# Altium PCB 0.PCB1.PcbDoc (part 3 of 8)
Units mil, origin at the board's own origin, x right, y up, seen from the top; angles counter-clockwise.
Board outline 3897.64 x 3897.64 mil, 6 copper layers (Top Layer, Layer 1, Layer 3, Layer 4, Layer 2, Bottom Layer), stack 60.567 mil thick; 715 components, 563 nets, 2530 pads, 1442 vias.
Unrouted connection lines stored in the file: 6.
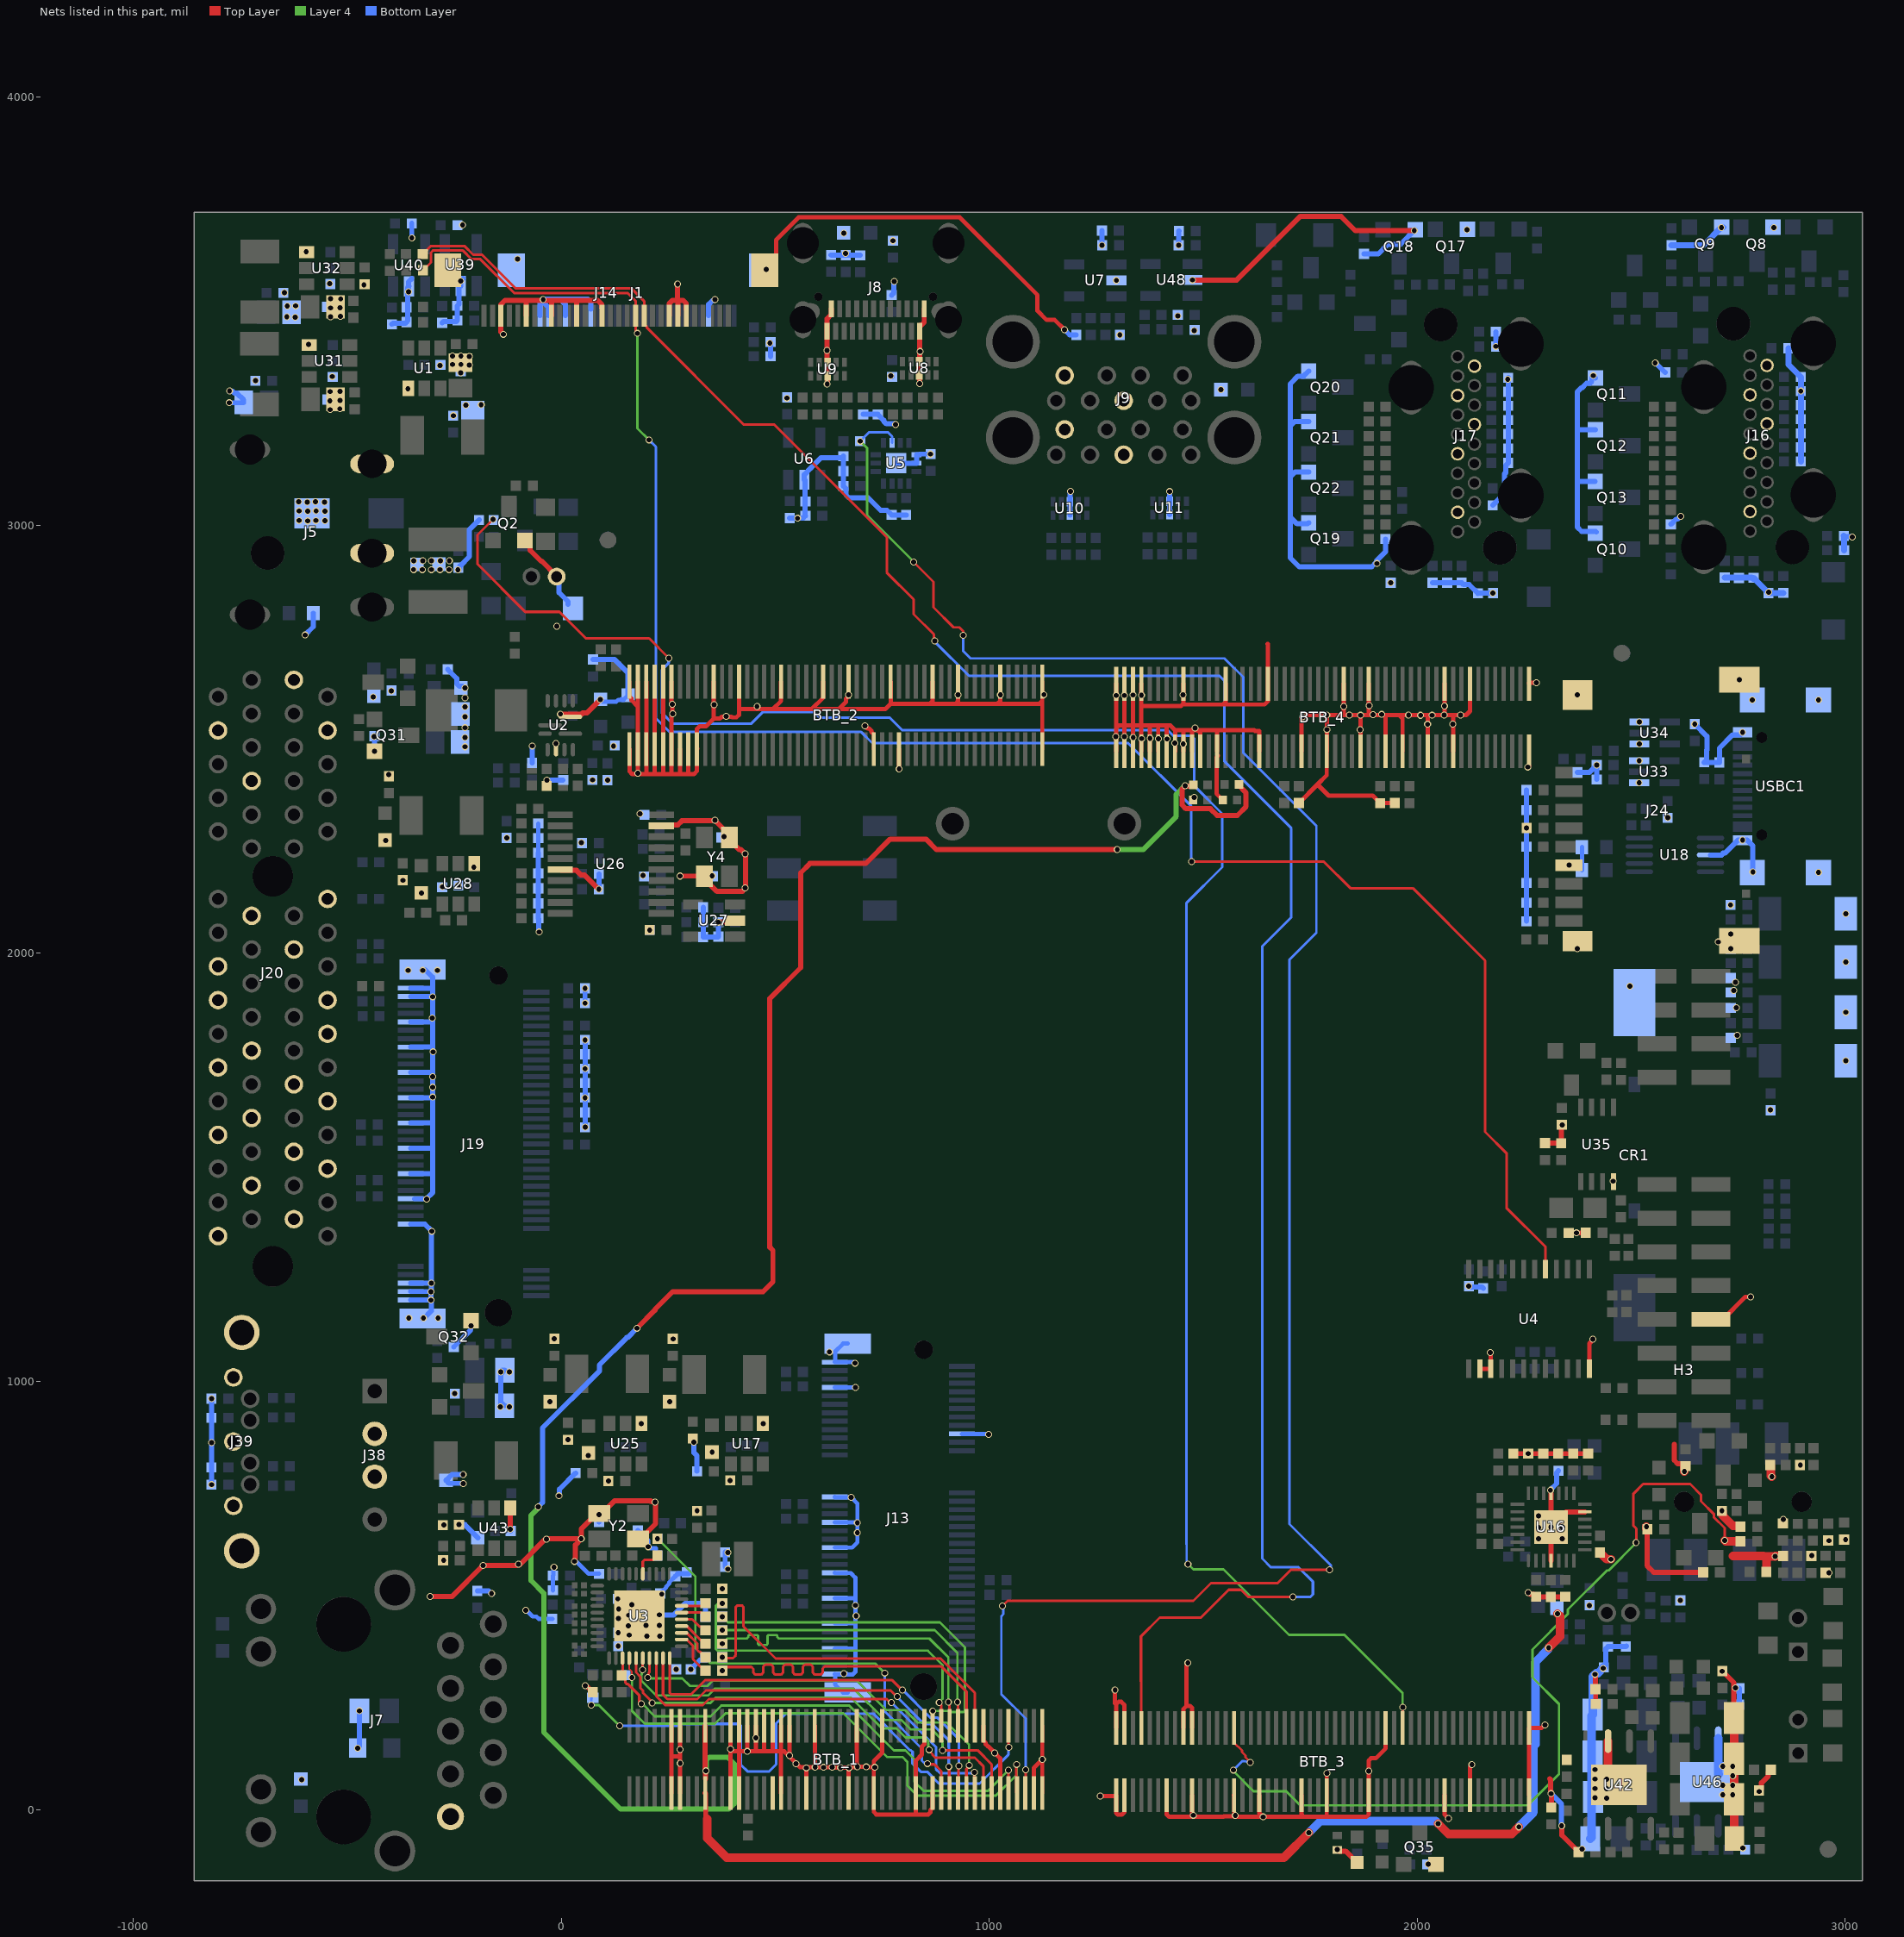
[diagram p7: the nets of this part, all layers, seen from the top]

## Via types
v1: diameter 16.14, hole 11.81, Top Layer to Bottom Layer, tented both sides, 1434 vias
v2: diameter 16.14, hole 11.81, Top Layer to Bottom Layer, 8 vias

## Nets (pads, with @x,y where several pads share a name; then routed paths per layer and width w, separated by ;. In a path a pad name is that pad's centre, name@x,y a point inside that pad or via, vN(x,y) a via of type N, cw(c..) or ccw(c..) an arc to the next point about the centre after c; other vN are vias at no path point) (continued)
CORE_VCCA_1V8_S0: BTB_1.10 BTB_1.91 L14.1 R20.2 R21.2 | length 7197.5
  Top Layer w12: v1(176.98,1124.22) 219.09,1166.33 219.09,1168.09 260.4,1209.4 471.6,1209.4 494.8,1232.6 494.8,1306 487.5,1313.3 487.5,1894.6 559.6,1966.7 559.6,2188.2 581.2,2209.8 711.9,2209.8 769,2266.9 852.2,2266.9 876.8,2242.3 1276.1,2242.3 ; BTB_1.91@336.65,38.17 337.73,37.09 337.73,-19.06 340.97,-22.3 ; BTB_1.10@336.65,195.65 336.65,92.97 338.2,91.42 v1(338.2,90.3) 337.43,89.53 BTB_1.91@337.43,71.54 ; 1277.7,2242.7 1278.1,2242.3 v1(1299.2,2242.3) ; v1(1457.5,2391.8) 1457.83,2391.47 v1@1457.83,2390.9 ; R20.2@1474.4,2394.7 1474.4,2392.14 1473.16,2390.9 v1@1457.83,2390.9 ; R21.2@1580.8,2394.4 1600.22,2374.98 1600.22,2342.72 1579.6,2322.1 1532.73,2322.1 1516.97,2337.86 1496.06,2337.86 1495.96,2337.96 1490.67,2337.96 1490.57,2337.86 1459.64,2337.86 1450.8,2346.7 1450.8,2383.87 v1@1457.83,2390.9
  Top Layer w20: 340.97,-22.3 340.97,-66.87 386.3,-112.2 1688.9,-112.2 v1(1746.9,-54.2) ; v1(2049.1,-33.1) 2073.3,-57.3 2220.9,-57.3 v1(2237.6,-40.6) ; v1(2307.1,377.9) 2333.4,404.2 2333.4,451.7 v1(2327.8,457.3)
  Layer 4 w12: v1@-51.9,705.6 -70.4,687.1 -70.4,534.9 -40.6,505.1 -40.6,180.27 138.77,0.9 391.6,0.9 404.4,13.7 404.4,106.4 388.7,122.1 346,122.1 338.97,115.07 338.97,91.07 v1(338.2,90.3) ; v1(1299.2,2242.3) 1359.7,2242.3 1437,2319.6 1437,2371.3 v1(1457.5,2391.8)
  Bottom Layer w12: v1(-53.3,707) -53.3,707.3 -43.3,717.3 -43.3,891.4 89.2,1023.9 89.2,1038.39 153.33,1102.52 155.27,1102.52 v1(176.98,1124.22)
  Bottom Layer w20: v1(1746.9,-54.2) 1773.8,-27.3 2043.3,-27.3 v1(2049.1,-33.1) ; v1(2237.6,-40.6) 2271.87,-6.33 2271.87,147.47 2276.39,151.98 2276.39,344.79 2307.1,375.5 v1(2307.1,377.9)
CTP0_INT: BTB_3.4 J14.11 R301.2 | length 5395.6
  Top Layer w6.16: R301.2@-323.22,3633.2 -303.99,3652.43 -226.15,3652.43 -205.47,3631.75 -184.58,3631.75 -106.63,3553.8 163.6,3553.8 193.87,3523.53 193.87,3469.84 200.57,3463.14 200.57,3461 426.67,3234.9 498.2,3234.9 760.8,2972.3 760.8,2889.5 823.6,2826.7 823.6,2792.4 870.9,2745.1 870.9,2732.2 v1(873.2,2729.9) ; 1354.6,299 1354.6,404.5 1398.34,448.24 1494.66,448.24 1559.62,513.2 1588.7,513.2 1605.3,496.6 v1(1709.4,496.6) ; BTB_3.4@1355.54,190.65 1355.54,299
  Bottom Layer w6.16: v1(873.2,2729.9) 873.2,2727.56 952.66,2648.1 1538.14,2648.1 1549.8,2636.44 1549.8,2448.2 1705.9,2292.1 1705.9,2084.5 1637.9,2016.5 1637.9,586 1658.1,565.8 1722.6,565.8 1756.4,532 1756.4,502.7 1750.3,496.6 v1(1709.4,496.6)
CTP0_RST: J14.12 R303.2 U4.17 | length 4599.8
  Top Layer w6.16: R303.2@-322.72,3595.6 -304.34,3613.98 -304.34,3637.14 -299.21,3642.27 -230.36,3642.27 -209.68,3621.59 -188.79,3621.59 -109.53,3542.33 155.57,3542.33 174.18,3523.72 J14.12@174.18,3489.52 174.18,3452.32 v1(178.2,3448.3) ; v1(1473.05,2214) 1782.25,2214 1844.12,2152.12 1989.72,2152.12 2158.81,1983.04 2158.81,1583.1 2208.71,1533.2 2208.71,1405.26 2299.79,1314.18 U4.17@2299.79,1261.94
  Layer 4 w5.61: v1(178.2,3448.3) 178.2,3226.3 v1(205.1,3199.4)
  Bottom Layer w6.16: v1(205.1,3199.4) 221.4,3183.1 221.4,2548.95 252.65,2517.7 700.1,2517.7 726.75,2491.05 1324.55,2491.05 1472.2,2343.4 1472.2,2214.85 v1(1473.05,2214)
EARPHONE_CTL: BTB_3.15 R326.2 | length 2090.5
  Top Layer w5.61: BTB_3.15@1572.7,177.5 1572.7,155.58 1590.53,137.76 1590.53,134.17 1596.66,128.04 1598.84,125.86 1598.84,121.9 1609.96,110.77 v1(1609.96,109.71)
  Top Layer w6.16: v1(2511.5,623.4) 2512.2,624.1 2512.2,655.9 2505.3,662.8 2505.3,737.8 2527.89,760.39 2637.74,760.39 2663.25,734.87 2663.25,720.15 2692.93,690.47 2692.93,682.91 2718.31,657.53 v1(2718.31,628.42)
  Top Layer w20: v1(2718.31,628.42) 2720.21,626.52 R326.2@2755.03,626.52
  Layer 4 w5.61: v1(1570.4,92.2) 1569.25,91.05 1569.25,90.75 1617.5,42.5 1693.9,42.5 1726.6,9.8 2258.1,9.8 2331.3,83 2331.3,246.3 2269.11,308.49 2269.11,373.8 2352.2,456.89 2352.2,467.6 2443.2,558.6 2447.4,558.6 v1@2511.85,623.05
  Bottom Layer w5.61: v1(1570.4,92.2) 1590.67,112.47 1591.01,112.81 1595.66,112.81 v1(1609.96,109.71)
EXT_PWR_EN: BTB_1.83
FAN_CTRL: BTB_3.35 R133.1 | length 4783.4
  Top Layer w6.16: v1(-159.3,3013.8) -195.5,2977.6 -195.5,2909.3 -84,2797.8 -4.3,2797.8 57.7,2735.8 205.6,2735.8 v1(251.8,2689.6) ; BTB_3.35@1965.78,190.65 1966.07,190.95 1966.07,238.64 v1(1966.36,238.94)
  Layer 4 w5.61: v1(1464.4,573.3) 1464.9,573.3 1477.25,560.95 1547.55,560.95 1700.6,407.9 1829.89,407.9 1965.7,272.09 1965.7,239.6 v1(1966.36,238.94)
  Bottom Layer w5.61: 1461.3,619.11 1461.3,579.25 1464.4,576.15 v1(1464.4,573.3)
  Bottom Layer w6.16: v1(251.8,2689.6) 251.17,2688.97 251.17,2678.07 235.79,2662.69 235.79,2561.05 260.74,2536.1 443.6,2536.1 471.65,2564.15 476.75,2564.15 477.2,2563.7 590,2563.7 603.3,2550.4 767.9,2550.4 796.75,2521.55 1416.95,2521.55 1430.2,2508.3 1472.6,2508.3 1478.7,2502.2 1478.7,2392 1544.5,2326.2 1544.5,2201.1 1461.3,2117.9 1461.3,619.11
FUSB302_INT: BTB_1.53 R87.2 U5.5 | length 4867.3
  Top Layer w5.61: v1(823.5,2914.1) 869.8,2867.8 869.8,2808.5 916.7,2761.6 930.3,2761.6 939.5,2752.4 v1(939.5,2742.9) ; v1(1030.86,475.37) 1043.01,487.52 1477.22,487.52 1518.6,528.9 1673.9,528.9 1705.1,560.1 v1(1795.1,560.1) ; BTB_1.53@1084.68,38.17 1085.04,38.53 1085.04,92.64 v1(1085.4,93)
  Layer 4 w5.61: v1(698.76,3196.4) 714.9,3180.26 714.9,3023.91 823.5,2915.31 v1(823.5,2914.1)
  Bottom Layer w5.61: v1(939.5,2742.9) 939.5,2706.1 956.6,2689 1549.64,2689 1593.8,2644.84 1593.8,2468.39 1764.4,2297.8 1764.4,2048.2 1701.4,1985.2 1701.4,667.05 1798,570.46 v1@1798,557.2 ; v1(1030.86,475.37) 1032.87,473.35 1032.87,460.89 1033.04,460.72 1033.04,456.08 1028.52,451.56 1028.52,269.38 1085.4,212.5 v1(1085.4,93)
  Bottom Layer w6.16: v1(698.76,3196.4) 719.36,3217 763.76,3217 773.36,3207.4 773.36,3193.18 U5.5@772.82,3192.64
GMAC0_MCLKINOUT: BTB_1.63 R67.1 R68.1 | length 1106.6
  Top Layer w6.16: v1(855.42,107.35) 857.33,105.44 872.18,105.44 887.83,89.78 BTB_1.63@887.83,38.17
  Layer 4 w5.61: v1(225.06,632.56) 313.67,543.95 313.67,376.53 347.6,342.6 364.25,342.6 365.95,340.9 734.3,340.9 v1(756.4,318.8)
  Bottom Layer w6.16: v1(756.4,318.8) 756.4,228.6 842.8,142.2 842.8,114.08 847.67,109.21 853.56,109.21 v1(855.42,107.35)
GMAC0_MCLKINOUT_R: R67.2 U3.35 | length 68.8
  Top Layer w6.16: U3.35@190.76,550.54 190.76,579.27 194.37,582.88 214.74,582.88 R67.2@225.06,593.2
GMAC0_MDC: BTB_1.55 R61.2 U3.13 | length 1195.8
  Top Layer w6.16: U3.13@143.52,353.68 143.52,315.24 R61.2@141.56,313.28 149.9,304.94 149.9,296.41 153.51,292.8 156.29,292.8 182.7,266.39 182.7,250.26 186.31,246.65 v1(187.34,246.65) ; v1(1045.1,91.5) 1045.21,91.39 1045.21,38.28 BTB_1.55@1045.31,38.17
  Layer 4 w5.61: v1@187.7,248.5 188,248.5 218.7,217.8 349.3,217.8 374.1,242.6 673,242.6 777.2,138.4 804.6,138.4 825.8,117.2 825.8,64.9 847.2,43.5 997.1,43.5 v1(1045.1,91.5)
GMAC0_MDIO: BTB_1.54 R62.2 U3.14 | length 1273.3
  Top Layer w4: U3.14@159.27,353.68 159.27,328.14 165.43,321.99 v1(165.43,308.34)
  Top Layer w6.16: v1(1063.9,105.3) 1063.2,104.6 1063.2,39.97 BTB_1.54@1065,38.17
  Layer 4 w5.61: v1@165.2,309.3 165.43,309.07 v1(165.43,308.34) 165.43,230.27 195.3,200.4 359.6,200.4 384,224.8 659.3,224.8 761.8,122.3 798,122.3 809,111.3 809,55.2 831.9,32.3 1015.4,32.3 1063.9,80.8 v1(1063.9,105.3)
GMAC0_RSTn: BTB_1.46 D7.1 | length 1404.6
  Top Layer w6.16: BTB_1.46@1045.32,195.65 1045.32,145.68 v1(1045.9,145.1)
  Layer 4 w5.61: v1(70.68,243.82) 70.9,243.6 88.1,243.6 136.4,195.3 v1(136.5,195.3)
  Bottom Layer w6.16: v1(70.68,243.82) 70.68,259.58 D7.1@71.1,260 ; v1(136.5,195.3) 275.85,195.3 280.65,200.1 416.32,200.1 419.93,196.49 419.93,104.66 436.09,88.5 485.2,88.5 502.2,105.5 502.2,119 502.7,119.5 502.7,201.5 525.12,223.92 729.58,223.92 815.2,138.3 817.39,138.3 821,134.69 821,107.2 840.2,88 855.2,88 882.5,60.7 977.6,60.7 1044.69,127.79 1044.69,143.89 v1(1045.9,145.1)
GMAC0_RXCLK: BTB_1.38 R56.1 R59.1 | length 810.2
  Top Layer w6.16: v1(883.3,250.1) 883.3,248.3 887.83,243.77 BTB_1.38@887.83,195.65
  Layer 4 w5.61: v1(376.5,481.78) 374.48,479.76 364.96,479.76 361.4,476.2 361.4,375.1 365.45,371.05 390.31,371.05 857.05,371.05 890.8,337.3 890.8,258.65 883.3,251.15 v1(883.3,250.1)
GMAC0_RXCLK_R: R56.2 U3.27 | length 58.3
  Top Layer w6.16: U3.27@281.32,475.73 331.09,475.73 R56.2@337.14,481.78
GMAC0_RXD0: BTB_1.40 R48.2 R51.1 | length 741.9
  Top Layer w6.16: v1(925.8,251.1) 927.2,249.7 BTB_1.40@927.2,195.65
  Layer 4 w5.61: v1@376.61,418.78 872.82,418.78 925.8,365.8 v1(925.8,251.1)
  other v1: 376.44,418.78
GMAC0_RXD0_R: R51.2 U3.25 | length 66.3
  Top Layer w6.16: U3.25@281.32,444.24 306.31,444.24 323.05,427.5 328.36,427.5 R51.2@337.08,418.78
GMAC0_RXD1: BTB_1.39 R49.2 R52.1 | length 763.2
  Top Layer w6.16: v1(904.7,250.6) 907.52,247.78 BTB_1.39@907.52,195.65
  Layer 4 w5.61: v1(376.44,387.28) 388.66,399.5 431.1,399.5 433.91,399.5 437.19,402.79 437.19,405.4 439.45,407.66 457.54,407.66 459.8,405.4 459.8,386.75 462.06,384.49 480.15,384.49 482.41,386.75 482.41,405.4 484.67,407.66 502.76,407.66 505.02,405.4 505.02,402.79 508.31,399.5 518.4,399.5 860.3,399.5 904.7,355.1 v1(904.7,250.6)
GMAC0_RXD1_R: R52.2 U3.24 | length 72.8
  Top Layer w6.16: U3.24@281.32,428.49 293.12,428.49 325.62,396 328.36,396 R52.2@337.08,387.28
GMAC0_RXD2: BTB_1.42 R54.1 R58.1 | length 889.5
  Top Layer w6.16: v1(376.44,355.78) R54.1@379.78,352.44 ; R54.1@386.7,353.7 401.6,353.7 408.1,360.2 408.1,473.09 411.71,476.7 422.39,476.7 426,473.09 426,427.84 501.4,352.44 886.44,352.44 966.57,272.31 BTB_1.42@966.57,195.65
GMAC0_RXD2_R: R54.2 U3.23 | length 88.2
  Top Layer w6.16: U3.23@281.32,412.74 293.13,412.74 318.2,387.67 318.2,372.55 322.35,368.4 324.46,368.4 R54.2@337.08,355.78
GMAC0_RXD3: BTB_1.41 R50.2 R55.1 | length 811.6
  Top Layer w6.16: v1(376.44,324.28) 385.16,333 418.1,333 444.34,333 448.97,328.37 448.97,319.71 453.6,315.07 467.5,315.07 472.13,319.71 472.13,333.76 476.76,338.4 490.66,338.4 495.29,333.76 495.29,319.71 499.92,315.07 513.82,315.07 518.45,319.71 518.45,333.76 523.08,338.4 536.98,338.4 541.61,333.76 541.61,319.71 546.24,315.07 560.14,315.07 564.77,319.71 564.77,333.76 569.4,338.4 583.3,338.4 587.93,333.76 587.93,319.71 592.56,315.07 606.46,315.07 611.09,319.71 611.09,329.48 615.72,334.11 675.31,334.11 888.19,334.11 946.89,275.41 BTB_1.41@946.89,195.65
GMAC0_RXD3_R: R55.2 U3.22 | length 104
  Top Layer w6.16: U3.22@281.32,396.99 293.12,396.99 308.04,382.07 308.04,351.21 326.25,333 328.36,333 R55.2@337.08,324.28
GMAC0_RXDV_CRS: BTB_1.37 R57.1 R60.1 | length 856
  Top Layer w6.16: BTB_1.37@868.15,195.65 868.15,230.05 v1(868.3,230.2)
  Layer 4 w5.61: v1(376.44,450.28) 389.62,437.1 884.79,437.1 943.1,378.8 943.1,230.89 939.81,227.6 906.78,227.6 904.18,230.2 v1(868.3,230.2)
GMAC0_RXDV_CRS_R: R57.2 U3.26 | length 59.8
  Top Layer w6.16: U3.26@281.32,459.98 327.38,459.98 R57.2@337.08,450.28
GMAC0_TXCLK: BTB_1.61 U3.20 | length 955.8
  Top Layer w6.16: U3.20@253.76,353.68 253.76,272.39 257.37,268.78 303.09,268.78 336.31,302 773.4,302 796,279.4 v1(797.61,279.4) ; BTB_1.61@927.2,38.17 928.05,39.02 928.05,100.75 v1(928.9,101.6)
  Bottom Layer w6.16: v1(797.61,279.4) 861.96,215.05 878.55,215.05 928.9,164.7 v1(928.9,101.6)
GMAC0_TXD0: BTB_1.59 U3.18 | length 998.5
  Top Layer w6.16: U3.18@222.26,353.68 222.26,264.64 243.1,243.8 331.1,243.8 345.3,258 760.84,258 768.85,249.99 v1(771.55,249.99) ; v1(965.25,87) 965.91,86.34 965.91,38.84 BTB_1.59@966.57,38.17
  Bottom Layer w6.16: v1(771.55,249.99) 875.55,145.99 875.55,94.45 884.9,85.1 963.35,85.1 v1(965.25,87)
GMAC0_TXD1: BTB_1.60 U3.17 | length 991.1
  Top Layer w6.16: v1(202.33,307.99) 204.24,309.9 204.24,318.71 206.51,320.98 U3.17@206.51,353.68 ; BTB_1.60@946.89,38.17 946.89,94.39 953.1,100.6 v1(953.1,103.3)
  Layer 4 w5.61: v1@201.7,310.6 206.1,306.2 283.1,306.2 300.67,288.63 341.75,288.63 354.62,301.5 690.6,301.5 760,232.1 803.9,232.1 833.1,202.9 901.3,202.9 953.1,151.1 v1(953.1,103.3)
GMAC0_TXD2: BTB_1.57 U3.16 | length 1047.6
  Top Layer w6.16: v1(190.36,326.26) 190.56,326.46 190.56,353.48 U3.16@190.76,353.68 ; v1(891,138.4) 972.8,138.4 1005.94,105.26 BTB_1.57@1005.94,38.17
  Layer 4 w5.61: v1(190.36,326.26) 188.35,324.25 188.35,315.05 187.45,314.15 187.45,301.28 222.44,266.3 342.9,266.3 359.3,282.7 682.7,282.7 756.1,209.3 794.6,209.3 816.8,187.1 865.3,187.1 891,161.4 v1(891,138.4)
GMAC0_TXD3: BTB_1.58 U3.15 | length 1042
  Top Layer w6.16: U3.15@175.02,353.68 175.02,320.18 185.15,310.05 185.15,283.55 191.6,277.1 191.6,272 212.74,250.86 v1(212.74,248.92) ; v1(859.87,139.6) 859.87,136.9 867.65,129.12 867.65,127.25 874,120.9 966.5,120.9 986.26,101.14 BTB_1.58@986.26,38.17
  Layer 4 w5.61: v1(212.74,248.92) 212.94,249.12 348.72,249.12 360.8,261.2 677.6,261.2 749.4,189.4 783.3,189.4 804.6,168.1 850.31,168.1 858,160.41 858,141.47 v1(859.87,139.6)
GMAC0_TXEN: BTB_1.62 U3.19 | length 939.7
  Top Layer w6.16: U3.19@238.01,353.68 238.01,267.99 248.2,257.8 318,257.8 338.1,277.9 769.9,277.9 783.92,263.88 v1(785.5,263.88) ; v1(905.6,100.25) 906.56,99.29 906.56,39.13 BTB_1.62@907.52,38.17
  Bottom Layer w6.16: v1(785.5,263.88) 785.5,262.14 848.44,199.2 868,199.2 905.6,161.6 905.6,145.23 906.15,144.68 906.15,132.12 905.6,131.57 v1(905.6,100.25)
GND: BTB_1.6 BTB_1.7 BTB_1.13 BTB_1.14 BTB_1.15 BTB_1.16 BTB_1.17 BTB_1.18 BTB_1.19 BTB_1.20 BTB_1.23 BTB_1.28 BTB_1.31 BTB_1.36 BTB_1.43 BTB_1.50 BTB_1.51 BTB_1.52 BTB_1.56 BTB_1.64 BTB_1.66 BTB_1.71 BTB_1.74 BTB_1.79 BTB_1.82 BTB_1.87 BTB_1.88 BTB_1.94 BTB_1.95 BTB_2.1 BTB_2.2 BTB_2.3 BTB_2.4 BTB_2.5 BTB_2.6 BTB_2.11 BTB_2.14 BTB_2.19 BTB_2.24 BTB_2.27 BTB_2.32 BTB_2.37 BTB_2.40 BTB_2.45 BTB_2.50 BTB_2.51 BTB_2.68 BTB_2.71 BTB_2.92 BTB_2.93 BTB_2.94 BTB_2.95 BTB_2.96 BTB_2.97 BTB_2.98 BTB_2.99 BTB_2.100 BTB_3.1 BTB_3.2 BTB_3.9 BTB_3.10 BTB_3.33 BTB_3.50 BTB_3.51 BTB_3.58 BTB_3.61 BTB_3.70 BTB_3.75 BTB_3.78 BTB_3.83 BTB_3.86 BTB_3.91 BTB_3.94 BTB_3.99 BTB_3.100 BTB_4.1 BTB_4.2 BTB_4.3 BTB_4.4 BTB_4.9 BTB_4.14 BTB_4.19 BTB_4.28 BTB_4.31 BTB_4.40 BTB_4.43 BTB_4.50 BTB_4.51 BTB_4.60 BTB_4.63 BTB_4.66 BTB_4.68 BTB_4.71 BTB_4.75 BTB_4.78 BTB_4.83 BTB_4.88 BTB_4.90 BTB_4.91 BTB_4.92 BTB_4.93 BTB_4.94 BTB_4.95 BTB_4.96 BTB_4.97 BTB_4.98 BTB_4.99 BTB_4.100 C1.2 C2.2 C3.2 C4.2 C5.2 C8.2 C9.2 C10.2 C11.2 C12.2 C13.2 C15.2 C17.2 C18.2 C19.2 C21.2 C22.2 C23.2 C24.2 C25.2 C26.2 C27.2 C28.2 C29.2 C30.2 C31.2 C32.2 C35.1 C36.1 C50.2 C51.2 C52.2 C53.2 C54.2 C55.2 C56.2 C57.2 C58.2 C59.2 C60.2 C61.2 C62.2 C63.2 C64.2 C65.2 C66.2 C67.2 C68.2 C69.2 C70.2 C71.2 C72.2 C73.2 C74.2 C77.2 C78.2 C81.2 C86.2 C87.2 C88.2 C89.2 C90.2 C91.2 C106.2 C107.2 C108.2 C109.2 C110.2 C111.2 C114.2 C116.2 C118.2 C119.2 C120.2 C121.2 C123.2 C124.2 C125.2 C129.2 C130.2 C141.2 C153.2 C158.2 C159.2 C160.2 C161.2 C162.2 C163.2 C164.2 C165.2 C166.2 C167.2 C168.2 C169.2 C170.2 C171.2 C172.2 C173.2 C174.2 C180.2 C181.2 C182.2 C183.2 C184.2 C185.2 C186.2 C187.2 C188.2 C193.2 C195.2 C196.2 C197.2 C198.2 C210.2 C211.2 C218.2 C219.2 C226.2 C227.2 C228.2 C229.2 C230.2 C231.2 C233.2 C234.2 C235.2 C236.2 C237.2 C238.2 C239.2 C240.2 C241.2 C249.2 C250.2 C253.2 C256.2 C257.2 C259.2 C260.2 C261.2 C262.2 C278.2 C280.2 C281.2 C282.2 C284.2 C285.2 C286.2 C288.2 C289.2 C291.2 C292.2 C293.2 C294.2 C299.1 C300.2 C301.2 C302.2 C303.2 C304.2 C305.2 C306.2 C307.2 C309.1 C310.2 C311.2 C312.2 CR1.2 D1.1 D2.1 D3.1 D4.1 D5.1 D6.1 D8.1 D9.1 D10.1 D11.1 D12.1 D13.1 D14.1 D15.2 D16.1 D17.1 D18.1 D19.1 D20.1 D21.1 D22.1 D23.2 D24.1 D25.1 D27.1 D28.1 D29.1 D30.1 D31.1 D32.1 D34.1 D35.1 D36.1 D37.1 D38.1 D39.1 D50.1 D51.1 D52.1 D53.1 D54.1 D59.2 D65.1 D66.1 D67.1 D68.1 D69.1 D70.1 D71.1 D72.1 D73.1 D78.1 D79.1 D80.1 D81.1 D82.1 D83.1 D85.1 D86.1 D87.1 D88.1 H3.7 J1.4 J1.18 J1.21 J1.23 J1.24 J1.25 J1.26 J5.2 J5.3 J7.10 J8.A1 J8.A12 J8.B1 J8.B12 J9.4 J9.7 J9.13 J9.16 J12.2 J13.1 J13.7 J13.18 J13.33 J13.39 J13.45 J13.51 J13.57 J13.63 J13.69 J13.75 J13.76 J13.77 J14.6 J14.7 J14.8 J14.16 J14.19 J14.22 J14.25 J14.28 J14.31 J14.32 J16.2 J16.5 J16.8 J16.11 J16.17 J17.2 J17.5 J17.8 J17.11 J17.17 J19.1 J19.3 J19.9 J19.15 J19.21 J19.27 J19.33 J19.39 J19.45 J19.51 J19.57 J19.71 J19.73 J19.75 J19.76 J19.77 J20.A1 J20.A4 J20.A12 J20.A15 J20.A18 J20.A20 J20.A23 J20.A24 J20.A27 J20.A28 J20.A31 J20.B4 J20.B7 J20.B13 J20.B16 J20.B18 J20.B21 J20.B22 J20.B25 J20.B26 J20.B29 J20.B32 J24.6 J24.10 J24.11 J24.12 J24.13 J38.2 J38.3 J39.1 J39.4 J39.7 J39.S1 J39.S2 L1.2 L11.2 L12.2 LED1.2 Q2.2 Q8.2 Q9.2 Q10.2 Q11.2 Q12.2 Q13.2 Q17.2 Q18.2 Q19.2 Q20.2 Q21.2 Q22.2 Q31.2 Q32.2 Q35.2 R7.2 R16.2 R17.2 R18.2 R22.1 R23.1 R53.2 R58.2 R59.2 R60.2 R66.2 R68.2 R71.2 R72.2 R78.1 R95.2 R97.2 R98.2 R99.2 R117.1 R118.2 R123.2 R135.2 R136.2 R139.2 R141.2 R149.2 R156.2 R160.2 R171.2 R177.2 R181.2 R192.2 R219.2 R220.2 R222.2 R227.2 R231.2 R232.2 R233.2 R234.2 R240.2 R241.2 R244.2 R245.2 R250.2 R252.2 R257.2 R271.2 R274.2 R308.2 R309.2 R317.2 R321.2 R322.2 R323.2 R325.2 R327.2 R335.2 R346.2 R352.2 SW1.1 SW2.1 SW3.1 SW4.1 U1.1 U2.2 U2.10 U3.41 U4.2 U4.3 U4.12 U5.8 U5.9 U5.15 U6.2 U7.2 U8.3 U8.8 U9.3 U9.8 U10.3 U10.8 U11.3 U11.8 U16.4 U16.13 U16.18 U16.29 U17.1 U18.3 U23.1 U25.1 U26.9 U26.16 U27.2 U28.1 U31.1 U32.1 U33.1 U33.3 U34.1 U34.3 U35.4 U39.2 U40.2 U42.7 U42.9 U43.1 U46.7 U46.9 U48.2 USBC1.13 USBC1.14 USBC1.15 USBC1.16 USBC1.A1B12 USBC1.B1A12 Y2.2 Y2.4 Y4.2 Y4.4 | length 29604.6
  Top Layer w10: BTB_2.100@159.49,2477.17 159.57,2477.09 159.57,2424.93 165.9,2418.6 310.2,2418.6 317.5,2425.9 317.5,2477.6 BTB_2.92@318.3,2478.4 ; BTB_2.1@159.49,2634.65 159.49,2600.36 164.25,2595.6 164.25,2591.02 179.17,2576.1 ; v1(179.17,2420.63) BTB_2.99@179.17,2477.17 179.17,2576.1 ; BTB_2.2@179.17,2634.65 179.17,2576.1 ; 198.2,2418.7 198.86,2419.36 BTB_2.98@198.86,2477.17 BTB_2.3@198.86,2634.65 ; 218.54,2419.36 BTB_2.97@218.54,2477.17 BTB_2.4@218.54,2634.65 ; 238.23,2419.36 BTB_2.96@238.23,2477.17 BTB_2.5@238.23,2634.65 ; BTB_1.95@257.91,38.17 257.91,123.95 ; BTB_1.6@257.91,195.65 257.91,123.95 ; 257.91,2419.36 257.91,2555.45 260.5,2558.04 v1(260.5,2559.7) 259.95,2560.25 259.95,2582.71 257.99,2584.67 257.99,2634.57 BTB_2.6@257.91,2634.65 ; BTB_1.94@277.6,38.17 277.68,38.25 277.68,107.28 v1(278.2,107.8) 278.1,107.9 278.1,123.95 ; BTB_1.7@277.6,195.65 277.68,195.57 277.68,140.42 278.1,140 278.1,123.95 ; 277.6,2419.36 BTB_2.94@277.6,2477.17 ; 297.28,2419.36 BTB_2.93@297.28,2477.17 ; BTB_2.92@316.97,2477.17 317.05,2477.25 317.05,2523.99 323.16,2530.1 338.2,2530.1 356.34,2548.24 ; BTB_2.11@356.34,2634.65 356.34,2548.24 ; BTB_1.88@395.71,38.17 v1(395.7,141.3) ; BTB_1.13@395.71,195.65 v1(395.7,141.3) ; BTB_1.87@415.39,38.17 415.39,135.7 ; BTB_1.14@415.39,195.65 415.39,135.7 ; BTB_2.14@415.39,2634.65 415.39,2570.6 ; BTB_1.15@435.08,195.65 v1(435.08,135.7) ; 454.76,138.29 BTB_1.16@454.76,195.65 ; 474.45,138.29 BTB_1.17@474.45,195.65 ; J14.32@475.37,3595.82 501.87,3622.31 501.87,3666.22 554.85,3719.2 931.4,3719.2 1112.9,3537.7 1112.9,3501.2 1134.45,3479.65 1153.18,3479.65 v1(1175.9,3456.93) ; 494.13,138.29 BTB_1.18@494.13,195.65 ; BTB_1.82@513.82,38.17 513.82,135.7 ; BTB_1.19@513.82,195.65 513.82,135.7 ; BTB_2.19@513.82,2634.65 BTB_2.19@513.82,2634.65 513.74,2589.54 494.8,2570.6 ; v1(533.5,126.1) BTB_1.20@533.5,195.65 ; BTB_1.79@572.87,38.17 v1(572.87,97.3) ; BTB_1.23@592.56,195.65 592.56,99.54 v1(593.4,98.7) ; BTB_2.24@612.24,2634.65 612.24,2597.32 585.52,2570.6 ; v1(613.44,98.38) 613.28,98.54 593.56,98.54 v1(593.4,98.7) ; v1@614.46,98.56 632.94,98.56 v1(633.12,98.74) ; v1@634.13,98.55 634.28,98.7 634.98,98 v1(652.79,98) 670.6,98 671.3,97.3 BTB_1.74@671.3,38.17 ; BTB_2.27@671.22,2600.28 665.54,2594.6 665.54,2587.14 649,2570.6 ; BTB_2.27@671.3,2634.65 671.3,2604.08 v1(671.43,2603.96) ; v1(672.46,97.26) 674.12,97.26 675.36,98.49 690.78,98.49 692.47,100.18 693.12,99.53 712.57,99.53 713.18,98.92 732.17,98.92 v1(732.65,98.43) ; BTB_1.28@690.98,195.65 690.98,100.68 v1(692,99.67) ; v1(709.7,2531.6) 715.76,2525.54 719.32,2525.54 724.59,2520.27 724.59,2517.23 730.35,2511.46 BTB_2.71@730.35,2477.17 ; BTB_1.31@750.04,195.65 750.04,132.74 730.35,113.05 BTB_1.71@730.35,38.17 730.35,-5.64 736.21,-11.5 829.4,-11.5 ; BTB_2.32@769.72,2634.65 769.72,2582.92 ; BTB_2.68@789.41,2477.17 789.49,2477.09 789.49,2431.21 v1(789.7,2431) ; BTB_1.36@848.46,195.65 848.39,195.57 848.39,152.26 842.8,146.67 842.8,128.14 828.78,114.12 BTB_1.66@828.78,38.17 828.78,-10.88 829.4,-11.5 ; BTB_1.64@868.15,38.17 868.15,3.88 862.39,-1.88 862.39,-6.74 857.63,-11.5 829.4,-11.5 ; BTB_2.37@868.15,2634.65 868.15,2589.75 861.32,2582.92 ; v1(927,2603.9) BTB_2.40@927.2,2604.11 ; BTB_2.40@927.2,2634.65 BTB_2.40@927.2,2604.11 ; BTB_1.43@986.26,195.65 986.26,161.36 992.02,155.6 992.02,152.56 997.3,147.28 997.92,147.28 v1(1012.9,132.3) 1025.63,119.57 BTB_1.56@1025.63,38.17 ; BTB_2.45@1025.55,2600.28 1025.55,2589.65 1018.82,2582.92 ; BTB_2.45@1025.63,2634.65 1025.63,2604.67 v1(1026.3,2604) ; BTB_1.52@1104.37,38.17 1104.37,97.23 v1(1124.06,116.91) ; BTB_1.51@1124.06,38.17 v1(1124.06,116.91) ; BTB_1.50@1124.06,195.65 v1(1124.06,116.91) ; BTB_2.51@1124.06,2477.17 1124.06,2589.86 ; BTB_2.50@1124.06,2634.65 BTB_2.50@1124.06,2604.38 ; v1(1128,2604.3) 1124.13,2604.3 BTB_2.50@1124.06,2604.38 ; v1(1259.6,31.7) 1296.41,31.7 1296.49,31.78 BTB_3.100@1296.49,33.17 1296.57,33.09 1296.57,-8.01 1300.46,-11.9 1310.24,-11.9 1316.09,-6.04 1316.09,33.09 BTB_3.99@1316.17,33.17 ; v1(1294.1,278.9) 1294.1,248.03 1296.49,245.64 ; v1(1295.6,2506.2) 1296.49,2505.31 BTB_4.100@1296.49,2472.17 ; BTB_3.1@1296.49,190.65 1296.49,245.64 ; BTB_4.100@1296.49,2506.2 1296.49,2525.89 ; BTB_4.1@1296.49,2629.65 v1(1296.51,2602.5) 1296.49,2525.89 ; v1(1315.9,2506.4) 1316.17,2506.13 BTB_4.99@1316.17,2472.17 ; BTB_3.2@1316.17,190.65 1316.17,243.73 1308.4,251.5 1302.35,251.5 1296.49,245.64 ; BTB_4.99@1316.17,2506.54 1316.17,2532.4 ; BTB_4.2@1316.17,2595.28 1316.17,2532.4 ; v1(1316.2,2602.5) BTB_4.2@1316.17,2629.65 ; BTB_4.98@1335.86,2472.17 1335.86,2503.96 v1(1336.4,2504.5) ; BTB_4.98@1335.86,2506.54 1335.86,2532.4 ; BTB_4.3@1335.86,2595.28 1335.86,2532.4 ; BTB_4.3@1335.86,2629.65 1335.86,2603.64 v1(1336.03,2603.47) ; BTB_4.97@1355.54,2472.17 BTB_4.97@1355.54,2501.69 ; BTB_4.4@1355.54,2595.28 1355.54,2577.77 ; BTB_4.4@1355.54,2629.65 1355.54,2602.76 v1(1355.7,2602.6) ; v1(1355.88,2501.69) BTB_4.97@1355.54,2501.69 ; BTB_4.96@1375.23,2472.17 BTB_4.96@1375.23,2502.35 ; 1375.23,2531.93 BTB_4.96@1375.23,2502.35 ; v1(1375.84,2502.35) BTB_4.96@1375.23,2502.35 ; BTB_4.95@1394.91,2472.17 1394.91,2500.81 v1(1395.5,2501.4) ; BTB_4.95@1394.91,2506.54 1394.91,2531.93 ; BTB_3.94@1414.6,33.17 1414.68,33.09 1414.68,-11.54 1420.53,-17.4 v1@1479.59,-17.4 ; BTB_4.94@1414.6,2472.17 1414.6,2531.93 ; v1(1433.8,2491.2) 1434.28,2490.72 BTB_4.93@1434.28,2472.17 ; BTB_4.93@1434.28,2506.54 1434.28,2521.42 ; BTB_3.9@1453.97,190.65 1454.05,190.73 1454.05,235.15 1461.11,242.21 ; BTB_4.92@1453.97,2472.17 1453.89,2472.25 1453.89,2519.63 1452.1,2521.42 ; BTB_4.9@1453.97,2629.65 1453.89,2629.57 1453.89,2583.63 1451.54,2581.28 ; v1(1464.3,342.6) 1463.4,341.7 1463.4,337.8 1461.11,335.51 1461.11,242.21 ; BTB_4.91@1473.57,2472.25 1473.57,2519.63 ; BTB_3.91@1473.65,33.17 1473.73,33.09 1473.73,-8.94 1476.66,-11.87 v1(1476.66,-13.53) ; BTB_3.10@1473.65,190.65 1473.57,190.73 1473.57,238.03 1469.39,242.21 1461.11,242.21 ; v1@1473.73,-11.54 v1@1479.59,-17.4 ; BTB_4.90@1493.34,2472.17 1493.26,2472.25 1493.26,2515.24 v1@1487.08,2521.42 ; BTB_4.88@1532.71,2472.17 1532.63,2519.63 ; BTB_4.88@1534.5,2461.5 1531.13,2458.13 1531.13,2373.04 R23.1@1545.87,2358.3 ; BTB_4.14@1552.39,2629.65 1552.39,2587.14 1546.54,2581.28 ; BTB_3.86@1572.08,33.17 1572.16,33.09 1572.16,-9.49 1575.1,-12.44 v1(1575.1,-14.1) ; v1@1574.87,-14.33 1574.87,-14.52 1573.19,-16.2 1548.24,-16.2 1547.03,-17.4 v1@1479.59,-17.4 ; v1@1577.94,-17.4 v1(1640,-17.4) ; BTB_4.83@1631.06,2472.25 1631.06,2519.63 1621.01,2519.63 1619.22,2521.42 v1@1487.08,2521.42 ; BTB_3.83@1631.13,33.17 1631.13,-8.53 v1(1640,-17.4) ; 1650.5,2723 1650.82,2722.68 BTB_4.19@1650.82,2629.65 BTB_4.19@1650.82,2629.65 1650.74,2588.58 1643.44,2581.28 1546.54,2581.28 ; R78.1@1723.67,2351.02 1767.07,2394.43 ; BTB_3.78@1729.56,33.17 1729.64,33.09 1729.64,-11.54 1735.5,-17.4 ; BTB_4.78@1729.56,2472.17 1729.56,2549.46 v1(1733.13,2553.03) 1736.7,2556.6 v1(1788.61,2556.6) ; v1(1789,84.5) 1788.61,84.11 BTB_3.75@1788.61,33.17 1788.61,-16.19 1787.4,-17.4 ; BTB_4.28@1827.98,2629.65 1828.06,2629.57 1828.06,2577.44 v1(1828.5,2577) 1827.98,2576.48 1827.98,2556.6 ; BTB_4.71@1867.35,2472.17 v1(1867.35,2556.21) ; 1887.04,2556.6 BTB_4.31@1887.04,2629.65 ; BTB_3.33@1926.41,190.65 BTB_3.33@1926.41,190.65 1926.33,142.77 1903.36,119.8 1892.26,119.8 1886.4,113.94 1886.4,90.6 v1(1887.04,89.96) BTB_3.70@1887.04,33.17 1887.04,-11.54 1881.18,-17.4 1787.4,-17.4 ; BTB_4.68@1926.41,2472.17 1926.41,2556.21 1926.8,2556.6 ; R149.2@1947.7,2351.02 R149.2@1947.7,2351.02 1913.65,2350.97 C253.2@1913.6,2350.92 1896.22,2368.3 1793.2,2368.3 1767.07,2394.43 ; BTB_4.66@1965.78,2472.17 1965.78,2548.62 1957.8,2556.6 ; BTB_4.63@2024.83,2472.17 2024.83,2555.17 2023.4,2556.6 ; BTB_3.61@2064.2,33.17 2064.28,33.09 2064.28,-12.38 2072.7,-20.8 v1(2072.7,-21.3) ; BTB_4.40@2064.2,2629.65 2064.2,2558.1 v1(2062.7,2556.6) ; BTB_4.60@2083.89,2472.17 2083.89,2551.99 2088.5,2556.6 ; BTB_3.58@2123.26,33.17 2123.26,100.36 v1(2127.8,104.9) ; BTB_4.43@2123.26,2629.65 2123.26,2565.56 2114.3,2556.6 v1(2101.4,2556.6) 2088.5,2556.6 ; U4.2@2146.24,1029.66 U4.3@2171.83,1029.66 2171.83,1066.27 v1(2170.4,1067.7) ; v1(2258.36,2435.19) BTB_4.51@2260.98,2437.8 ; BTB_3.51@2261.06,33.17 BTB_3.50@2261.06,190.65 2290.95,190.65 2297.7,197.4 v1(2298.6,197.4) ; BTB_4.50@2261.05,2629.65 2261.05,2632.32 2261.13,2632.4 v1(2278.8,2632.4) ; U4.12@2402.15,1029.66 2402.15,1088.6 2410.5,1096.95 v1(2410.5,1098.61) ; H3.7@2686.5,1144.98 2714.26,1144.98 2766.58,1197.3 v1(2778.5,1197.3) ; 257.91,123.95 278.1,123.95 ; 356.34,2548.24 370.48,2548.24 374.97,2552.72 384.12,2552.72 v1(385.3,2553.9) 386.48,2552.72 398.14,2552.72 399.83,2551.04 409.54,2551.04 415.39,2556.89 415.39,2570.6 ; v1(395.7,141.3) 397.37,141.29 402.96,135.7 415.39,135.7 ; 415.39,135.7 v1(435.08,135.7) ; 415.39,2570.6 494.8,2570.6 ; v1(435.08,135.7) 513.82,135.7 ; 494.8,2570.6 585.52,2570.6 ; 513.82,135.7 521,135.7 558,98.7 v1(593.4,98.7) ; 585.52,2570.6 649,2570.6 ; 649,2570.6 757.4,2570.6 769.72,2582.92 ; 769.72,2582.92 861.32,2582.92 ; 861.32,2582.92 921.35,2582.92 ; 921.35,2582.92 1018.82,2582.92 ; 921.35,2582.92 927.2,2588.78 BTB_2.40@927.2,2604.11 ; 1018.82,2582.92 1117.12,2582.92 1124.06,2589.86 ; 1124.06,2589.86 BTB_2.50@1124.06,2604.38 ; 1296.49,2525.89 1303,2532.4 1316.17,2532.4 ; 1316.17,2532.4 1335.86,2532.4 ; 1335.86,2532.4 1355.54,2532.4 ; BTB_4.97@1355.54,2501.69 1355.54,2532.4 ; 1355.54,2532.4 1423.3,2532.4 1434.28,2521.42 ; 1355.54,2532.4 1355.54,2577.77 ; 1355.54,2577.77 1448.03,2577.77 1451.54,2581.28 ; 1434.28,2521.42 1452.1,2521.42 ; 1451.54,2581.28 1546.54,2581.28 ; 1452.1,2521.42 v1@1487.08,2521.42 ; v1(1640,-17.4) 1735.5,-17.4 ; 1735.5,-17.4 1787.4,-17.4 ; 1767.07,2394.43 1788.61,2415.97 BTB_4.75@1788.61,2472.17 1788.69,2472.25 1788.69,2522.19 v1(1789.3,2522.8) 1788.96,2523.14 1788.96,2556.26 v1(1788.61,2556.6) ; v1(1788.61,2556.6) 1827.98,2556.6 ; 1827.98,2556.6 1841.2,2556.6 v1(1841.4,2556.8) 1841.7,2556.5 1867.26,2556.5 1867.35,2556.6 1896,2556.6 v1(1897.1,2557.7) 1898.2,2556.6 1926.8,2556.6 ; 1926.8,2556.6 1957.8,2556.6 ; 1957.8,2556.6 v1(1979.8,2556.6) 1980.05,2556.35 2007.75,2556.35 v1(2008,2556.1) 2008.5,2556.6 2023.4,2556.6 ; 2023.4,2556.6 v1(2062.7,2556.6) ; v1(2062.7,2556.6) 2088.5,2556.6
  Top Layer w12: C180.2@-411.48,2264.7 -410.38,2263.6 v1(-409.98,2263.6) ; v1(-305.9,497.4) -255.3,497.4 -181.7,571 -180.6,569.9 -104.48,569.9 -101.12,573.26 v1(-100,573.26) ; C292.2@-276.62,664.01 -274.88,664.01 v1(-274.32,664.57) ; R322.2@-276.08,582.07 v1(-274.42,582.07) ; v1(-238.92,666.07) -237.84,664.99 C294.2@-238.62,664.99 ; v1(-134.9,3446.1) -140.78,3451.98 J14.28@-140.78,3489.52 -140.68,3489.62 -140.68,3515.56 -131.14,3525.11 85.81,3525.11 94.4,3516.52 J14.16@94.4,3509.4 ; U43.1@-119.02,704.81 -118.95,704.74 -118.95,654.92 v1(-118.88,654.85) ; v1@-97.4,571 -35.7,632.7 v1(46.8,632.7) ; Q2.2@-84.5,2964.1 -72.5,2952.1 -72.5,2941.66 -46.83,2915.99 -44.99,2915.99 -10.47,2881.47 J12.2@-10.47,2880 ; J14.25@-81.72,3489.52 -81.62,3489.62 -81.62,3522.68 -81,3523.3 ; J14.22@-22.67,3489.52 -22.6,3489.59 -22.6,3524.3 ; U26.16@-2.19,2195.61 -0.32,2193.74 35.76,2193.74 46.6,2182.9 54.79,2182.9 v1(88.06,2149.63) 88.49,2149.2 v1@89.9,2149.2 ; v1(-1.65,2559.06) 48.48,2559.06 50.61,2561.19 59.83,2561.19 v1(91.85,2593.2) ; v1(31.43,579.54) 32.22,580.34 32.22,586.51 33.42,587.71 33.42,618.2 46.8,631.58 v1(46.8,632.7) ; 36.2,3523 36.3,3522.9 36.3,3489.62 J14.19@36.39,3489.52 ; v1(56.37,288.84) 57.16,288.04 59.74,288.04 C58.2@73.86,273.92 ; Y2.4@88.71,691.24 82.8,691.24 46.8,655.23 v1(46.8,632.7) ; Y2.4@94.61,691.24 124.3,720.92 208.99,720.92 211.04,718.87 218.81,718.87 v1(219.6,718.08) ; Y2.2@179.26,632.18 185.17,632.18 220.5,667.51 v1@220.5,713.89 ; v1(206.7,2054) 206.7,2054.23 C162.2@207,2054.53 ; U26.9@234.03,2297.97 235.9,2299.85 272.35,2299.85 282.24,2309.73 360.29,2309.73 393.51,2276.51 Y4.2@393.51,2270.61 393.51,2264.7 415.89,2242.32 419.99,2242.32 430.88,2231.43 v1@430.88,2151.5 ; J14.8@252.92,3489.52 252.92,3518.57 259.95,3525.6 272.3,3525.6 ; v1(272.2,3563.2) 272.2,3525.7 272.3,3525.6 ; J14.7@272.61,3489.52 272.52,3489.62 272.52,3525.38 272.3,3525.6 ; v1(277.48,2180.53) 333.98,2180.53 Y4.4@334.45,2180.06 334.45,2174.15 364.14,2144.47 423.85,2144.47 423.85,2145.75 429.72,2151.62 v1(429.72,2152.75) ; J14.6@292.1,3503.9 291.9,3504.1 291.9,3518.57 284.87,3525.6 272.3,3525.6 ; v1(367.3,2072.72) 368.09,2073.51 403.57,2073.51 U27.2@406.49,2076.43 ; v1(621.6,3329.8) 622.07,3330.27 622.07,3348.54 U9.3@622.53,3349 U9.8@622.53,3380.5 621.51,3381.52 v1(621.51,3408.3) 621.51,3452.92 J8.A12@621.41,3453.02 621.51,3453.11 621.51,3482.43 631.26,3492.18 J8.B1@631.26,3505.77 ; v1(781.06,3234.87) v1@783.13,3234.87 ; v1(837.7,3331.2) 837.28,3331.62 837.28,3350.49 U8.3@836.87,3350.9 U8.8@836.87,3382.4 837.91,3383.44 837.91,3405.11 v1(838.7,3405.9) 838.04,3406.56 838.04,3452.92 J8.A1@837.95,3453.02 837.95,3466.61 838.04,3466.7 841.16,3466.7 848.19,3473.73 J8.B12@848.19,3505.77 ; v1(1475.01,3572.93) 1578.13,3572.93 1726.4,3721.2 1822.3,3721.2 1855.26,3688.24 v1(1993.1,3688.24) ; R22.1@1476.58,2357.7 1478.7,2359.82 v1(1478.7,2364.6) ; v1(1813.3,-93.2) 1817.2,-97.1 1832.8,-97.1 LED1.2@1859.7,-124 ; C118.2@2224.41,831.31 v1(2259.41,831.31) C107.2@2294.41,831.31 C106.2@2329.41,831.31 C109.2@2364.41,831.31 C110.2@2399.41,831.31 ; v1(2259.12,506.61) 2260.24,506.61 2263.96,502.89 2272.41,502.89 C114.2@2278.21,497.09 2278.32,496.98 2345.7,496.98 C123.2@2345.81,496.87 ; D59.2@2298.7,1556.58 2298.85,1556.43 C238.2@2336.25,1556.43 ; 2309.75,71.45 2311.83,69.37 v1@2311.83,37.05 ; U16.4@2312.97,581.18 v1(2312.97,659.92) ; U16.18@2312.97,738.66 v1(2312.97,659.92) ; R346.2@2313.4,4.98 v1@2313.4,39.2 ; C238.2@2336.1,1556.28 C238.2@2336.25,1556.43 ; v1(2337.39,-38.42) 2338.06,-39.09 2338.06,-60.36 C299.1@2377.05,-99.35 ; C237.2@2337.7,1599.32 2337.78,1599.4 v1(2338.6,1599.4) ; C237.2@2339.5,1603.8 2336.9,1601.2 2336.9,1557.08 C238.2@2336.25,1556.43 ; v1(2372.29,1346.9) 2390.5,1346.9 C241.2@2391.1,1347.5 ; U16.13@2391.71,695.35 2348.4,695.35 v1(2312.97,659.92) ; v1(2415.61,315.77) 2416.07,315.31 2416.07,281.61 C300.2@2416.53,281.15 2416.88,280.8 2416.88,246.8 C301.2@2417.23,246.45 ; v1(2457.8,1467.8) 2458.51,1467.09 U35.4@2458.69,1467.09 ; R325.2@2536.91,655.22 2536.91,569.64 2552.53,554.02 D80.1@2668.03,554.02 ; 2600.51,852.62 2600.51,815.62 2608.41,807.72 2621.11,807.72 2626.51,802.32 D79.1@2626.51,801.52 ; C278.2@2713.01,323.31 2739.69,296.63 C218.2@2739.69,213.45 ; v1(2799.1,42.1) 2804.4,47.4 2804.4,62.44 2820.38,78.42 2820.38,87 C312.2@2826.18,92.8
  Top Layer w20: C120.2@2427.11,600.29 2442.77,584.63 v1(2452.39,584.63) ; U42.9@2438.81,78.65 2445.91,85.75 U42.7@2445.91,159.81 ; v1(2535.61,660.68) 2535.61,656.52 2536.03,656.52 R325.2@2537.73,654.82 ; v1(2624.21,789.54) 2624.21,799.02 2625.11,799.92 2625.11,800.12 D79.1@2626.51,801.52 ; v1(2711.81,697.64) 2713.6,695.84 2713.6,686.54 2737.53,662.62 2753.43,662.62 C289.2@2755.23,660.82 ; 2737.61,592.1 2809.33,592.1 2810.51,590.92 ; C218.2@2739.69,213.45 2740.42,212.72 2740.42,-67.22 C219.2@2741.15,-67.95 C219.2@2747.17,-61.93 ; R327.2@2815.79,554.82 2815.79,585.64 2810.51,590.92 ; D81.1@2824.41,804.64 2826.2,802.84 2826.2,779.63 v1(2828.56,777.28) ; v1(2836.47,590.92) 2810.51,590.92 ; v1@2836.47,592.38 R118.2@2854.71,592.38 ; C288.2@2894.11,804.64 2894.49,805.02 v1(2895.21,805.02) ; C121.2@2920.81,592.08 2920.87,592.08 v1(2921.91,593.12)
  Bottom Layer w10: v1(-475.5,143.5) R71.2@-471.34,147.66 ; v1(-162.6,504.6) -162.6,504.08 v1@-161.2,502.68 ; R244.2@-127.7,2269.62 -127.48,2269.62 v1(-127.1,2270) ; v1(-82.88,465.4) -81.21,465.4 -66.55,450.74 -57.84,450.74 -52.2,445.1 C68.2@-20.6,445.1 ; R241.2@-53.32,2234.63 R240.2@-53.32,2268.97 R245.2@-53.32,2303.3 ; C66.2@-19.18,512 -19.13,512.05 -19.13,546.25 C67.2@-19.08,546.3 -17.88,547.5 -17.88,564.77 v1(-16.7,565.95) ; v1@35.6,579.2 64.26,550.54 R53.2@88.41,550.54 ; v1(91.85,2593.2) 96.99,2588.06 129.16,2588.06 133.38,2592.28 145.44,2592.28 C17.2@156.19,2603.03 ; v1(203.43,613.76) 205.09,613.76 208.25,610.6 221.9,610.6 221.9,596.36 R68.2@225.06,593.2 ; v1(234.96,503.18) 234.96,508.3 246,519.34 246,521.05 252.26,527.3 252.26,530.34 C69.2@266.8,544.88 ; J13.75@639.2,316.55 J13.75@640.11,315.65 ; J13.69@639.2,375.61 685.12,375.61 ; J13.63@639.2,434.66 685.12,434.66 ; J13.57@639.2,493.72 685.12,493.72 687.3,495.9 ; J13.51@639.2,552.77 639.55,552.42 676.48,552.42 687.3,541.6 687.3,495.9 ; J13.45@639.2,611.83 679.75,611.83 692.1,624.18 v1(692.1,646.83) v1(692.1,669.49) ; J13.39@639.2,670.88 690.71,670.88 v1(692.1,669.49) ; J13.33@639.2,729.94 640.11,729.03 v1(677.87,729.03) 692.1,714.8 v1(692.1,669.49) ; J13.7@639.23,985.87 v1(687.6,985.9) ; v1(660.77,317.15) J13.75@660.77,315.65 ; J13.77@669.71,273.25 658.73,273.25 640.11,291.87 J13.75@640.11,315.65 ; J13.76@669.71,1088.21 658.73,1088.21 640.11,1069.58 640.11,1045.8 J13.1@639.2,1044.9 682.44,1044.9 684.64,1042.7 v1(686.3,1042.7) ; J13.18@936.45,877.58 996.62,877.58 997.9,876.3 v1(998.9,876.3) ; v1(2354.73,2205.97) 2375.15,2205.97 C35.1@2384.86,2196.26 ; C36.1@2384.81,2248.32 2384.86,2248.27 C35.1@2384.86,2196.26 ; C35.1@2384.91,2194.5 2384.91,2196.21 C35.1@2384.86,2196.26 ; J13.75@640.11,315.65 J13.75@660.77,315.65 ; J13.75@660.77,315.65 681.44,315.65 687.3,321.5 687.3,495.9
  Bottom Layer w12: v1(-816.9,758.9) D87.1@-816.9,799.1 v1(-816.9,856.95) D86.1@-816.9,914.8 v1(-816.9,959.8) ; v1(-775.19,3286.1) -742.55,3286.1 C226.2@-741.75,3286.9 -741.75,3292.81 -757.4,3308.46 -763.31,3308.46 -767.45,3312.61 -774,3312.61 v1(-774.79,3313.4) ; R66.2@-608.1,70.9 -606.6,69.4 v1(-606.5,69.4) ; v1(-598.43,2743.4) -578.96,2762.88 L1.2@-578.96,2794.7 ; R71.2@-471.34,147.66 v1(-471.34,230.3) ; v1(-436.15,2471.85) R257.2@-436.15,2507.49 ; R309.2@-395.5,3469.44 -392.72,3472.22 -363.76,3472.22 C261.2@-360.98,3475 -358.19,3477.79 -358.19,3555.2 U40.2@-356.8,3556.59 ; v1(-356.8,3545.2) U40.2@-356.8,3556.59 ; U40.2@-355.4,3557.99 U40.2@-356.8,3556.59 ; J19.75@-351.5,1190.33 -351.41,1190.24 -304.8,1190.24 v1(-304.41,1189.84) ; J19.73@-351.5,1210.01 -351.41,1209.92 -304.41,1209.92 v1(-304.01,1209.52) ; J19.71@-351.5,1229.7 -304,1229.7 v1(-303.5,1229.2) ; J19.57@-351.5,1367.49 -318.69,1367.49 v1@-302.79,1351.59 ; J19.45@-351.5,1485.6 -303.1,1485.6 -302.9,1485.8 ; J19.39@-351.5,1544.66 -303.1,1544.66 ; J19.33@-351.5,1603.71 -303.1,1603.71 ; J19.27@-351.5,1662.77 -302.65,1662.77 -301.32,1664.1 v1(-300.2,1664.1) ; J19.21@-351.5,1721.82 -303.1,1721.82 ; J19.15@-351.5,1780.88 -303.1,1780.88 ; J19.9@-351.5,1839.93 -303.1,1839.93 ; J19.3@-351.5,1898.99 v1@-303.1,1898.99 ; J19.1@-351.5,1918.67 -303.1,1918.67 ; U40.2@-348.94,3576.25 -356.8,3568.39 U40.2@-356.8,3556.59 ; v1(-348.94,3670.86) C262.2@-348.94,3705.2 ; J19.51@-342,1426.4 -315.01,1426.4 v1(-314.38,1425.77) -314.38,1426.89 -300.5,1440.77 -300.5,1663.8 v1(-300.2,1664.1) ; J19.77@-325.1,1961.5 -324.42,1961.5 J19.77@-323.94,1961.98 -318.12,1961.98 -300.5,1944.36 -300.5,1687.17 -300.29,1686.96 -300.29,1664.19 v1(-300.2,1664.1) ; J19.76@-323.94,1147.02 -321.12,1147.02 -303.5,1164.64 -303.5,1190.33 -304,1190.83 -304,1210.01 -303.5,1210.51 v1(-303.5,1229.2) ; v1(-302,1350.8) -302,1349.68 -303.5,1348.18 v1(-303.5,1229.2) ; R308.2@-278.1,3472.94 -275.27,3475.77 -245.11,3475.77 C256.2@-242.28,3478.6 -242.48,3478.8 -242.48,3512.2 C257.2@-242.68,3512.4 -238.71,3516.37 -238.71,3554.7 U39.2@-234.73,3558.67 v1(-234.73,3570.47) U39.2@-228.74,3576.47 ; C291.2@-269.42,769.17 -268.52,769.17 -255.22,782.47 v1(-229.12,782.47) ; C291.2@-269.02,768.67 -262.21,761.86 -229.51,761.86 v1(-228.72,761.07) ; C24.2@-265.04,2663.2 -243.65,2641.81 -243.65,2629.75 -237.7,2623.8 C23.2@-230.4,2623.8 ; R321.2@-250.78,1080.6 -211.01,1120.37 -211.01,1128.98 v1(-210.22,1129.77) ; v1(-238.92,666.07) -238.13,665.28 -225.03,665.28 C293.2@-194.62,634.87 ; C3.2@-236.5,2896.9 -236.5,2904.84 -214.1,2927.24 -214.1,2989.98 R135.2@-191.8,3012.28 ; v1(-230.2,3701.3) -229.14,3701.3 v1@-228.74,3701.7 ; C56.2@-195.9,510.58 -169.7,510.58 -163.42,504.3 v1@-163.1,504.3 ; v1(-141.82,940.7) -139.32,943.2 C280.2@-132.28,943.2 C280.2@-140.92,951.84 ; C280.2@-141.42,941.73 -140.92,942.23 C280.2@-140.92,951.84 ; v1(-141.32,1022.5) -137.62,1026.2 C281.2@-131.78,1026.2 ; C281.2@-137.09,1020.89 -140.92,1017.06 C280.2@-140.92,951.84 ; v1(-118.88,654.85) -118.88,651.73 R317.2@-117.92,650.77 ; R18.2@-67.79,2444.99 -67.79,2484.49 v1(-67.69,2484.59) ; R241.2@-53.42,2234.63 -53.42,2081.73 R220.2@-53.52,2081.63 -52.41,2080.53 -52.41,2050.53 v1(-51.62,2049.73) ; J1.24@-49.18,3489.66 -49.18,3518.78 -41.9,3526.06 v1(-41.9,3527.18) ; v1@-39.1,3526.2 -39.1,3518.76 -29.49,3509.16 J1.23@-29.49,3489.66 ; v1@-37.5,3528.2 -2.71,3528.2 ; v1(-32.99,2404.61) -32.8,2404.8 3.1,2404.8 R17.2@3.51,2404.39 ; J12.2@-10.47,2880 -4.86,2874.38 -4.86,2842.42 16,2821.57 D15.2@16,2815.1 ; v1(-5,732.7) -4.21,733.49 -4.21,747.85 R227.2@33.74,785.8 ; J1.21@9.88,3489.66 9.78,3489.76 9.78,3515.71 -2.71,3528.2 ; v1@16.1,862.7 v1(16.1,863.82) ; C172.2@55.78,1797.7 v1(55.89,1797.59) 55.89,1593.91 C183.2@56,1593.8 ; v1(55.89,1883.59) C170.2@55.78,1883.7 55.78,1917.98 v1(55.89,1918.09) ; J1.18@69.7,3505.2 69.7,3520.5 62,3528.2 -2.71,3528.2 ; C27.2@74.95,2686.83 C27.2@74.4,2686.28 124.92,2686.28 156.19,2655.01 C17.2@156.19,2603.03 ; v1(88.06,2149.63) C166.2@88.06,2185.57 ; C54.2@88.71,671.54 v1(88.71,688.86) ; C17.2@140.7,2593.1 C17.2@140.81,2592.99 ; C55.2@179.26,651.88 202.64,628.5 202.64,614.55 v1(203.43,613.76) ; v1(229.4,454.7) 263.13,454.7 290.21,481.78 R59.2@337.14,481.78 R60.2@337.08,450.28 ; C69.2@266.8,544.88 272.42,550.5 297.92,550.5 C71.2@301.3,553.88 ; v1(302.8,327.24) 308.6,333.04 308.6,333.54 325.04,349.98 331.28,349.98 R58.2@337.08,355.78 ; v1(309.67,858.33) 310.39,857.61 310.39,833.35 317.41,826.33 R141.2@317.41,790.05 ; C188.2@331.94,2107.73 C186.2@331.94,2072.88 C187.2@331.94,2038.03 332.43,2038.52 366.81,2038.52 C185.2@367.3,2039.01 v1(367.3,2072.72) ; J1.4@344.52,3489.66 344.62,3489.76 344.62,3515.71 354.16,3525.25 357.63,3525.25 v1(359.7,3527.32) ; C53.2@382.98,600.98 C52.2@382.98,567.08 383.76,567.08 v1(389.26,561.58) ; C29.2@489.28,3394.7 489.33,3394.75 489.33,3427.95 C30.2@489.38,3428 ; v1(527.52,3297.02) 528.12,3297.62 C86.2@528.12,3298.76 ; R95.2@534,3016.94 534.3,3016.64 551.99,3016.64 v1(552.28,3016.35) ; v1@552.3,3016.2 553.09,3016.99 565.61,3016.99 C87.2@570.82,3022.2 569.41,3023.61 569.41,3104.98 U6.2@568,3106.39 568,3118.19 583.6,3133.79 583.6,3134.13 606.77,3157.29 655.26,3157.29 C81.2@659.4,3161.43 C74.2@659.4,3126.47 C77.2@659.4,3091.5 665.2,3085.7 665.2,3071.13 672.23,3064.1 717.3,3064.1 746.49,3034.91 761.19,3034.91 C73.2@772.06,3024.04 772.16,3024.14 805.86,3024.14 C72.2@805.96,3024.24 ; D12.1@630.6,3631.46 631.09,3630.97 698.21,3630.97 D11.1@698.7,3630.48 ; L12.2@659.8,3683.3 660.2,3682.9 v1(660.2,3682.6) ; v1(664.1,3635.27) 664.1,3631.68 R97.2@664.8,3630.98 ; D9.1@705.6,3259.12 705.7,3259.02 739.87,3259.02 D8.1@739.97,3258.92 753.8,3245.09 753.8,3242.8 759.66,3236.94 778.99,3236.94 v1(781.06,3234.87) ; v1(769.94,3349.13) 770.61,3349.13 D10.1@773.1,3346.64 ; D13.1@772.1,3537.66 777.41,3542.97 777.41,3568.41 v1(778.2,3569.2) ; R98.2@775.2,3664.68 v1(775.5,3664.67) ; U5.15@782.66,3145 U5.9@830.3,3145 U5.8@830.3,3164.69 ; U5.8@831.97,3164.69 836.01,3164.69 837.59,3166.26 v1(863.06,3166.26) ; v1(1175.9,3456.93) 1188.08,3444.75 C89.2@1203.4,3444.75 ; U10.8@1188.59,3023.33 U10.3@1188.59,3054.83 1189.41,3055.65 1189.41,3078.34 v1(1190.2,3079.13) ; C90.2@1263.42,3688.13 1263.62,3687.93 1263.62,3654.43 v1(1263.82,3654.23) ; U11.8@1421.51,3024.63 U11.3@1421.51,3056.13 1421.66,3056.27 1421.66,3078.59 v1(1421.8,3078.73) ; R323.2@1440.52,3491.23 1440.52,3489.41 v1(1440.9,3489.03) ; v1(1442.92,3654.03) 1443.17,3654.28 1443.17,3687.18 C286.2@1443.42,3687.43 ; v1(1479.33,3455.03) 1480.08,3455.78 C284.2@1480.08,3456.33 ; Q19.2@1746.4,3006.04 1743.8,3003.44 1719.3,3003.44 1703.4,3019.34 ; Q22.2@1746.4,3124.08 1714.23,3124.08 1703.4,3113.24 ; Q21.2@1746.4,3242.11 1713.46,3242.11 1703.4,3232.04 ; Q20.2@1746.4,3360.14 1734.4,3348.14 1721.3,3348.14 1703.4,3330.24 1703.4,3232.04 ; R181.2@1875.6,3633.96 1909.26,3633.96 1931.84,3656.54 1961.2,3656.54 Q18.2@1995.2,3690.54 1995.2,3690.34 v1(1993.1,3688.24) ; R192.2@1925.69,2967.84 1925.69,2938.04 1904.51,2916.86 1904.51,2913.87 1893.68,2903.04 1724.26,2903.04 1703.4,2923.9 1703.4,3019.34 ; D38.1@2035.8,2865.63 D34.1@2103.8,2865.58 ; D34.1@2103.8,2865.58 2107.84,2861.54 2121.29,2861.54 C153.2@2141.9,2840.93 2142.1,2841.14 2176.89,2841.14 v1(2177.1,2841.34) ; C32.2@2121.5,1223.3 2124.7,1220.1 2151.72,1220.1 C31.2@2154.2,1217.62 ; D35.1@2176.31,3046.66 2204.35,3074.7 2204.35,3120.33 2206.78,3122.76 2206.78,3139.65 D37.1@2212.58,3145.44 2212.67,3145.53 D71.1@2212.67,3342.21 ; D73.1@2183.86,3451.94 2184.12,3451.68 v1(2184.12,3417.9) D72.1@2184.38,3417.64 ; v1(2211.6,3341.14) D71.1@2212.67,3342.21 ; D71.1@2212.76,3344.71 2212.76,3342.3 D71.1@2212.67,3342.21 ; D16.1@2255.4,2075.02 v1(2255.4,2293.02) 2255.44,2293.06 D21.1@2255.48,2381.32 D21.1@2255.48,2381.32 ; v1(2311.26,745.78) 2311.26,746.9 2325.83,761.47 2325.83,786.99 C124.2@2330.11,791.27 ; v1(2313.01,37.05) 2337,13.06 2337,-38.03 v1(2337.39,-38.42) ; D22.1@2374.41,2422.5 2402.01,2422.5 v1(2419.23,2439.72) v1(2419.23,2439.72) 2419.28,2406.27 C10.2@2419.33,2406.22 ; 2376,3222.31 2376.8,3223.11 Q12.2@2416.6,3223.11 ; v1(2402.1,476.66) R136.2@2403.05,477.64 ; Q11.2@2407.8,3343.91 2407.8,3335.61 2404.1,3331.91 2395.7,3331.91 2384.38,3320.6 2382.78,3320.6 2374.3,3312.11 2374.3,3102.21 ; v1(2411.49,3349.62) 2411.49,3348.52 Q11.2@2416.1,3343.91 ; Q13.2@2415.8,3102.21 2374.3,3102.21 ; Q10.2@2418.4,2984.01 2416.9,2985.51 2384.2,2985.51 2374.3,2995.41 2374.3,3102.21 ; v1(2434.51,329.85) 2440.7,336.03 2440.7,375.51 D78.1@2445.58,380.4 2445.82,380.63 2487.37,380.63 D83.1@2487.61,380.87 ; D83.1@2487.61,380.4 D83.1@2489.02,381.81 ; v1(2518.56,2398.42) U33.1@2518.6,2398.64 U33.1@2518.6,2398.64 ; v1(2555.9,3379.31) 2557.14,3379.31 R156.2@2579.34,3357.11 ; C235.2@2585.16,2316.44 2585.16,2317.02 v1(2585.26,2317.12) ; R171.2@2592.78,3002.21 2604.75,3014.19 2608.32,3014.19 2615.09,3020.96 v1(2615.82,3020.96) ; v1(2648.36,2535.4) 2676.81,2506.95 2676.81,2475.42 2676.26,2474.87 2676.26,2452 D24.1@2670.46,2446.2 2670.6,2446.06 2705.82,2446.06 D25.1@2705.96,2445.92 2705.96,2479.15 2737.3,2510.49 2754.39,2510.49 v1(2760.21,2516.31) ; U18.3@2685.16,2229.84 2710.56,2229.84 2714.73,2234.01 2719.05,2234.01 2749.38,2264.34 v1(2760.21,2264.34) 2771.03,2264.34 2784.27,2251.1 v1(2784.27,2190.17) USBC1.15@2782.84,2188.75 ; C311.2@2752.17,244.75 2752.62,245.2 2752.62,282.7 C310.2@2753.07,283.15 ; C4.2@2825.4,1633.42 2825.4,1634.1 v1(2825.5,1634.2) ; D30.1@3000.2,2974.11 3000.81,2973.5 3015.91,2973.5 v1(3016.7,2972.71) ; 1703.4,3019.34 1703.4,3113.24 ; 1703.4,3113.24 1703.4,3232.04
  Bottom Layer w14: R160.2@2594,3654.23 2668.92,3654.23 2710.6,3695.91 Q9.2@2710.8,3695.91 ; v1(2710.8,3695.31) Q9.2@2710.8,3695.91 ; Q9.2@2711.2,3696.51 2710.8,3696.11 Q9.2@2710.8,3695.91 ; Q9.2@2715.8,3695.91 Q9.2@2710.8,3695.91 ; D31.1@2718.5,2877.65 2718.71,2877.44 2782.17,2877.44 D27.1@2784.9,2874.71 ; D27.1@2785.9,2877.23 2796.1,2867.03 2796.1,2866.33 2820.12,2842.31 D32.1@2820.6,2842.31 ; D32.1@2820.7,2841.73 D32.1@2820.7,2841.78 ; v1(2820.8,2843.77) 2820.7,2843.67 D32.1@2820.7,2841.78 ; Q8.2@2831.2,3696.61 2832.1,3696.61 v1(2833,3695.71) ; C141.2@2855.3,2841.83 C141.2@2855.3,2841.83 D32.1@2820.7,2841.78 ; D65.1@2867.26,3413.51 2867.26,3375.21 D54.1@2896.26,3346.21 v1(2896.26,3313.33) D52.1@2896.26,3280.44 D51.1@2896.26,3247.56 D50.1@2896.26,3214.68 D14.1@2896.26,3181.79 D5.1@2896.26,3148.91 ; D30.1@2996.7,2975.01 2996.94,2974.77 2996.94,2941.75 D28.1@2997.18,2941.51
  Bottom Layer w20: C306.2@2404.47,-68.45 2407.19,-65.73 2407.19,219.12 C305.2@2409.92,221.85 2409.92,310.28 2415.41,315.77 v1(2415.61,315.77) ; v1@2415.51,315.87 2418.21,318.57 2422.25,318.57 C307.2@2435.81,332.13 ; U46.7@2703.41,166.51 2703.41,83.35 U46.9@2704.41,82.35
  other v1: 2025.72,-127.6 2385.21,-92.55 2760.81,-90.05 2442.21,26.35 2415.61,27.05 2713.91,34.55 2737.11,34.75 2415.61,49.11 2442.21,48.41 2713.91,56.61 2737.11,56.81 2415.61,71.18 2442.21,70.48 2737.11,78.88 2415.61,93.25 712.7,99.4 2713.91,100.75 2737.11,100.95 549,106.6 278,140.1 454.76,166.97 2743.71,283.85 2712.41,322.85 268.91,327.22 133.42,381.54 200.42,405.18 230.8,404.8 159.2,407.4 133.42,413.04 157.1,429.3 198.6,430.04 229.6,430 134.1,446.2 689.12,452.43 157.7,453.7 134.3,468.7 687.9,476.8 164.8,478.22 2614.87,488.33 132.38,492.1 376.44,515.78 2962.45,553.14 -182.4,569.9 389.26,600.48 2962.45,627.92 3000.95,630.64 -34,631.5 2283.49,632.22 2338.61,632.22 2283.49,658.92 2338.61,659.92 2855.67,677.97 2283.49,685.62 317.5,697.68 110.44,767.43 394.8,768.2 63.5,826.95 352.87,834.7 187.25,901.29 471.9,901.39 -120.56,940.7 -26,952.8 253.77,952.5 -248.62,971.65 -120.56,1022.5 626.8,1068.9 261.37,1099.28 -15.9,1099.48 -356,1148.1 -321.75,1148.1 -287.5,1148.1 2120.65,1222.58 56.11,1593.69 55.79,1662.69 -300.38,1687.17 -300.18,1711.57 55.89,1730.59 3001.4,1748.9 -299.18,1769.87 2747.5,1808.2 -300.88,1848.77 3001.4,1862.3 2745.4,1873.2 -300.38,1898.57 2739.75,1913.28 2497,1923.6 2743.53,1932.6 -357.58,1960.17 -323.33,1960.17 -289.08,1960.17 3001.4,1979.5 2374.42,2011.05 2732.52,2010.9 2703.6,2026.6 2732.22,2045.1 3001.4,2092.1 2732.12,2113.03 -326.38,2140.6 -276.68,2155.42 -240.38,2158.16 -369.48,2170.5 352.95,2181.16 191.36,2181.89 2937.56,2188.75 -203.88,2201.29 429.68,2232.53 47.5,2258.53 380.78,2272.63 359.09,2310.83 184.28,2325.93 108.31,2404.41 73.11,2404.99 -402.58,2417.65 2518.6,2449.64 -224.8,2482.6 122.29,2483.89 1453.4,2489 2519.1,2488.96 -11.93,2490 1415.2,2500.8 -224.8,2503.9 -437.25,2506.29 1866.7,2522.6 1481,2526.3 -224.8,2527 2024.2,2535 2083.1,2535.2 2519.1,2540.14 -224.8,2552.9 2034.6,2556.2 1917.1,2558.2 -224.5,2575.6 457.6,2577.1 2063.5,2578 1887.7,2578.7 357.6,2580.6 259.4,2581.6 2782.84,2591.89 2937.56,2591.89 -224.5,2596.9 -438.95,2599.15 1453,2604.1 2374.42,2603.6 -397.15,2612.99 -224.5,2620 2752.38,2639.04 -9.8,2763.9 1938.21,2865.86 -344.93,2896.4 -324.18,2896.4 -303.44,2896.4 -282.69,2896.4 -261.95,2896.4 -241.21,2896.12 1906.1,2910.6 -344.33,2916.9 -323.58,2916.9 -302.84,2916.9 -282.09,2916.9 -261.35,2916.9 -592.36,3010.21 -612.03,3011.18 -572.7,3011.1 -551.9,3010.5 -592.26,3032.51 -572.6,3033.4 -551.8,3032.8 -611.93,3033.48 -593.46,3053.81 -553,3054.1 -613.13,3054.78 -573.8,3054.7 -252.1,3255.98 -539.7,3270.1 -517,3272.1 -222.9,3280.72 -186.88,3281.57 -540.4,3290.9 -516.68,3291.78 -539.8,3312.3 -516.9,3313 1541.42,3316.83 -358.1,3318.58 -713.99,3337.7 -534.69,3347.4 -234.77,3355.91 -283,3372.92 -214.6,3374 -254,3375.8 -234.32,3375.59 -214.4,3394.4 -234.27,3395.28 -253.96,3395.48 -589.94,3422.3 487.6,3425.8 1305.3,3444.55 -621.24,3485.87 -640.91,3486.68 -539,3486.9 -515.6,3487.6 -538.5,3507.7 -516.3,3508.4 -639.89,3512.37 -620.21,3512.58 -515.1,3528.7 -538.4,3529.5 -646.41,3543.18 -460.74,3561.57 -540.43,3564.37 1297.21,3572.03 479.41,3597.85 -101.69,3621.65 -595.55,3639.18 2116.5,3690.04